# Altium PCB PCB1.PcbDoc (part 2 of 2)
Units mm, origin at the board's own origin, x right, y up, seen from the top; angles counter-clockwise.
Board outline 95 x 45 mm, 2 copper layers (Top Layer, Bottom Layer); 41 components, 96 nets, 303 pads, 0 vias.
Unrouted connection lines stored in the file: 18.
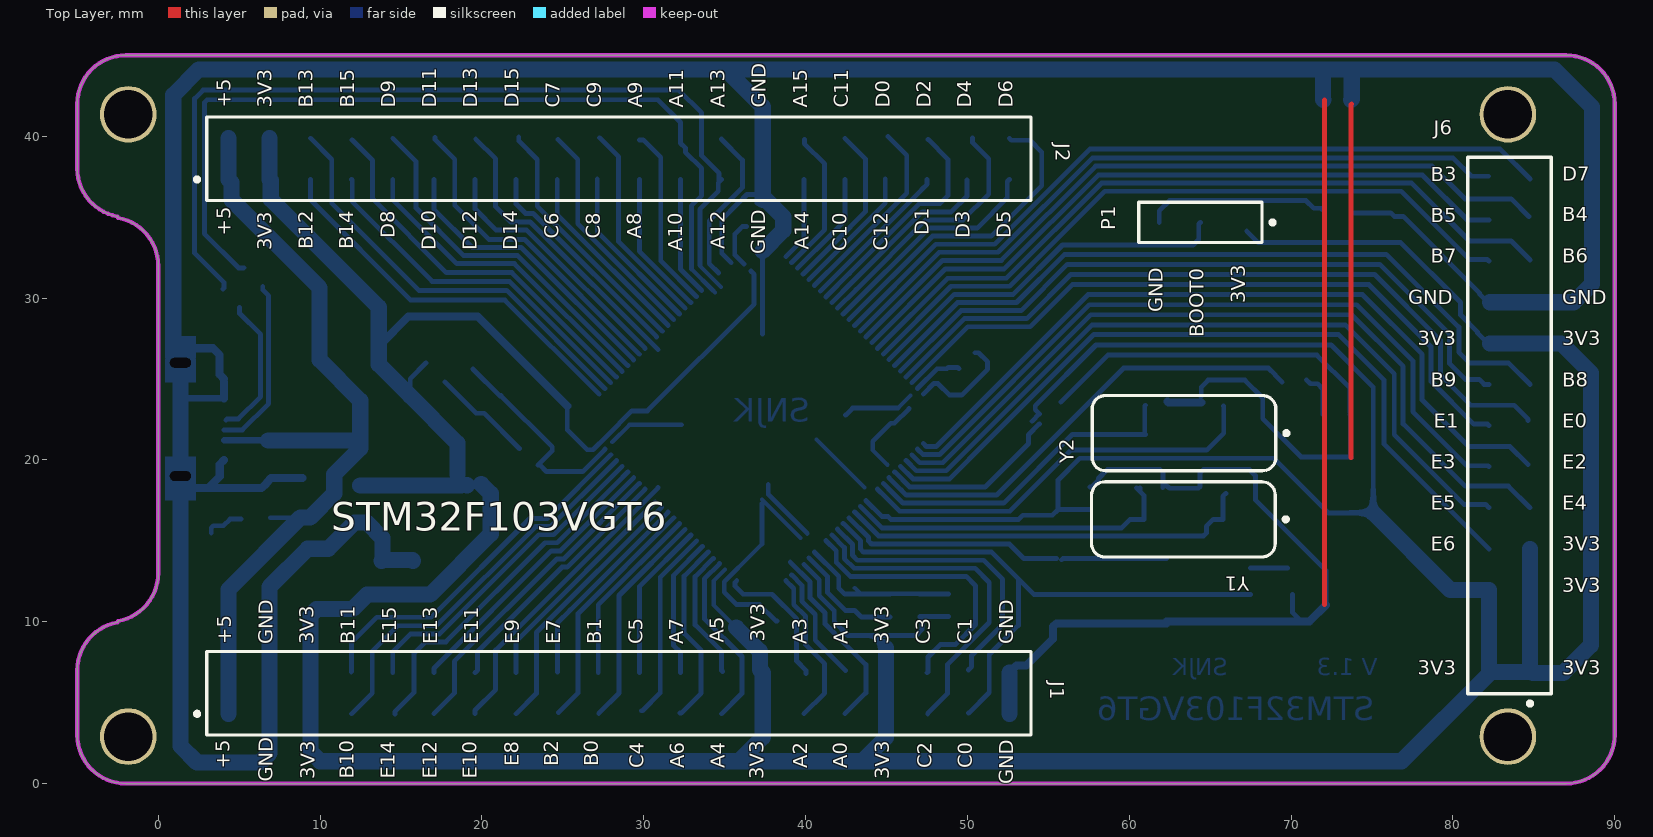
[diagram p0: Top Layer view]

## Silkscreen, mask and mechanical layers (free items; w line width, h text height) (continued)
Top Overlay: (continued)
  text "A9" at 30.232,41.749 h1.52 r90
  text "A11" at 32.76,41.749 h1.52 r90
  text "A13" at 35.304,41.749 h1.52 r90
  text "GND" at 37.86,41.75 h1.52 r90
  text "A15" at 40.404,41.749 h1.52 r90
  text "C11" at 42.961,41.75 h1.52 r90
  text "D0" at 45.505,41.75 h1.52 r90
  text "D2" at 48.032,41.75 h1.52 r90
  text "D4" at 50.556,41.75 h1.52 r90
  text "D6" at 53.1,41.75 h1.52 r90
  text "D7" at 86.75,36.95 h1.52
  text "B3" at 78.632,36.916 h1.52
  text "B4" at 86.75,34.423 h1.52
  text "B5" at 78.624,34.378 h1.52
  text "D1" at 47.922,33.882 h1.52 r90
  text "+5" at 4.783,33.845 h1.52 r90
  text "D3" at 50.463,33.694 h1.52 r90
  text "D8" at 14.913,33.691 h1.52 r90
  text "D5" at 53,33.686 h1.52 r90
  text "C6" at 25.055,33.656 h1.52 r90
  text "C8" at 27.609,33.653 h1.52 r90
  text "A8" at 30.149,33.659 h1.52 r90
  text "B12" at 9.848,33.017 h1.52 r90
  text "B14" at 12.372,33.01 h1.52 r90
  text "A12" at 35.318,33.014 h1.52 r90
  text "A14" at 40.5,32.999 h1.52 r90
  text "3V3" at 7.324,32.963 h1.52 r90
  text "D10" at 17.454,32.938 h1.52 r90
  text "D12" at 19.978,32.946 h1.52 r90
  text "D14" at 22.502,32.939 h1.52 r90
  text "A10" at 32.69,32.906 h1.52 r90
  text "C12" at 45.398,32.908 h1.52 r90
  text "C10" at 42.845,32.9 h1.52 r90
  text "GND" at 37.815,32.711 h1.52 r90
  text "B6" at 86.75,31.876 h1.52
  text "B7" at 78.632,31.856 h1.52
  text "3V3" at 67.488,29.677 h1.52 r90
  text "GND" at 77.25,29.301 h1.52
  text "GND" at 86.75,29.316 h1.52
  text "GND" at 62.393,29.127 h1.52 r90
  text "BOOT0" at 64.9,27.575 h1.52 r90
  text "3V3" at 77.83,26.759 h1.52
  text "3V3" at 86.75,26.769 h1.52
  text "B8" at 86.75,24.222 h1.52
  text "B9" at 78.629,24.217 h1.52
  text "E1" at 78.827,21.691 h1.52
  text "E0" at 86.75,21.675 h1.52
  text "E3" at 78.639,19.149 h1.52
  text "E2" at 86.75,19.144 h1.52
  text "E5" at 78.632,16.611 h1.52
  text "E4" at 86.75,16.618 h1.52
  text "STM32F103VGT6" at 10.7,15.035 h3
  text "E6" at 78.639,14.068 h1.52
  text "3V3" at 86.75,14.071 h1.52
  text "3V3" at 86.75,11.523 h1.52
  text "3V3" at 37.8,8.769 h1.52 r90
  text "A5" at 35.242,8.708 h1.52 r90
  text "+5" at 4.833,8.6 h1.52 r90
  text "GND" at 7.391,8.6 h1.52 r90
  text "3V3" at 9.935,8.6 h1.52 r90
  text "B11" at 12.463,8.6 h1.52 r90
  text "E15" at 15.008,8.6 h1.52 r90
  text "E13" at 17.553,8.6 h1.52 r90
  text "E11" at 20.081,8.6 h1.52 r90
  text "E9" at 22.625,8.6 h1.52 r90
  text "E7" at 25.149,8.6 h1.52 r90
  text "B1" at 27.678,8.6 h1.52 r90
  text "C5" at 30.235,8.6 h1.52 r90
  text "A7" at 32.759,8.599 h1.52 r90
  text "A3" at 40.389,8.599 h1.52 r90
  text "A1" at 42.917,8.599 h1.52 r90
  text "3V3" at 45.462,8.6 h1.52 r90
  text "C3" at 48.019,8.6 h1.52 r90
  text "C1" at 50.576,8.6 h1.52 r90
  text "GND" at 53.133,8.6 h1.52 r90
  text "3V3" at 77.83,6.417 h1.52
  text "3V3" at 86.75,6.417 h1.52
  text "E8" at 22.6,1.056 h1.52 r90
  text "B2" at 25.017,1.062 h1.52 r90
  text "B0" at 27.5,1.054 h1.52 r90
  text "A2" at 40.4,0.959 h1.52 r90
  text "C4" at 30.3,0.946 h1.52 r90
  text "A6" at 32.8,0.948 h1.52 r90
  text "A4" at 35.317,0.952 h1.52 r90
  text "A0" at 42.9,0.951 h1.52 r90
  text "C2" at 48.1,0.952 h1.52 r90
  text "C0" at 50.6,0.945 h1.52 r90
  text "+5" at 4.733,0.9 h1.52 r90
  text "B10" at 12.4,0.296 h1.52 r90
  text "E14" at 14.917,0.305 h1.52 r90
  text "E12" at 17.517,0.311 h1.52 r90
  text "E10" at 20,0.303 h1.52 r90
  text "3V3" at 9.983,0.25 h1.52 r90
  text "3V3" at 37.733,0.25 h1.52 r90
  text "3V3" at 45.483,0.25 h1.52 r90
  text "GND" at 7.383,0.1 h1.52 r90
  text "GND" at 53.133,-0.05 h1.52 r90
Bottom Overlay:
  text "3V" at 12.783,27.675 h1.52 r90
  text "5V" at 8.517,15.9 h1.52 r270
Bottom Paste:
  rectangle: 17.55,16.7 20.125,20.125
Board:
  lines w0.254: -2.521,9.954 ccw(c-2,7) -5,7 -5,3 ccw(c-2,3) -2,0 ; -2.521,35.046 cw(c-2,38) -5,38 -5,42 cw(c-2,42) -2,45 ; -2,0 87,0 ; -2,0 87,0 ; -2,45 87,45 ; -2,45 87,45 ; 0,13 cw(c-3,13) -2.479,10.046 ccw(c-3,13) 0,13 ; 0,13 0,32 ; 0,32 ccw(c-3,32) -2.479,34.954 cw(c-3,32) 0,32 ; 87,0 ccw(c87,3) 90,3 ; 87,45 cw(c87,42) 90,42 ; 90,3 90,42 ; 90,3 90,42
Pad Layer:
  region: 71.388,12.175 71.388,9.625 72.912,9.625 72.912,12.175
  region: 70.65,43.012 70.65,41.3 72.837,41.3 72.837,43.012
  region: 72.938,43.012 72.938,41.325 75.225,41.325 75.225,43.012

## Dimensions
-2,45 to -2,0 on Dimensions
90,-5.25 to -5,3 on Dimensions

## Text inside footprints (layer, text, board x,y; h text height)
J5: Mechanical 1 "PCB EDGE" at -0.175,15.3 h0.3 r270